# Allegro board MULTIFX.brd
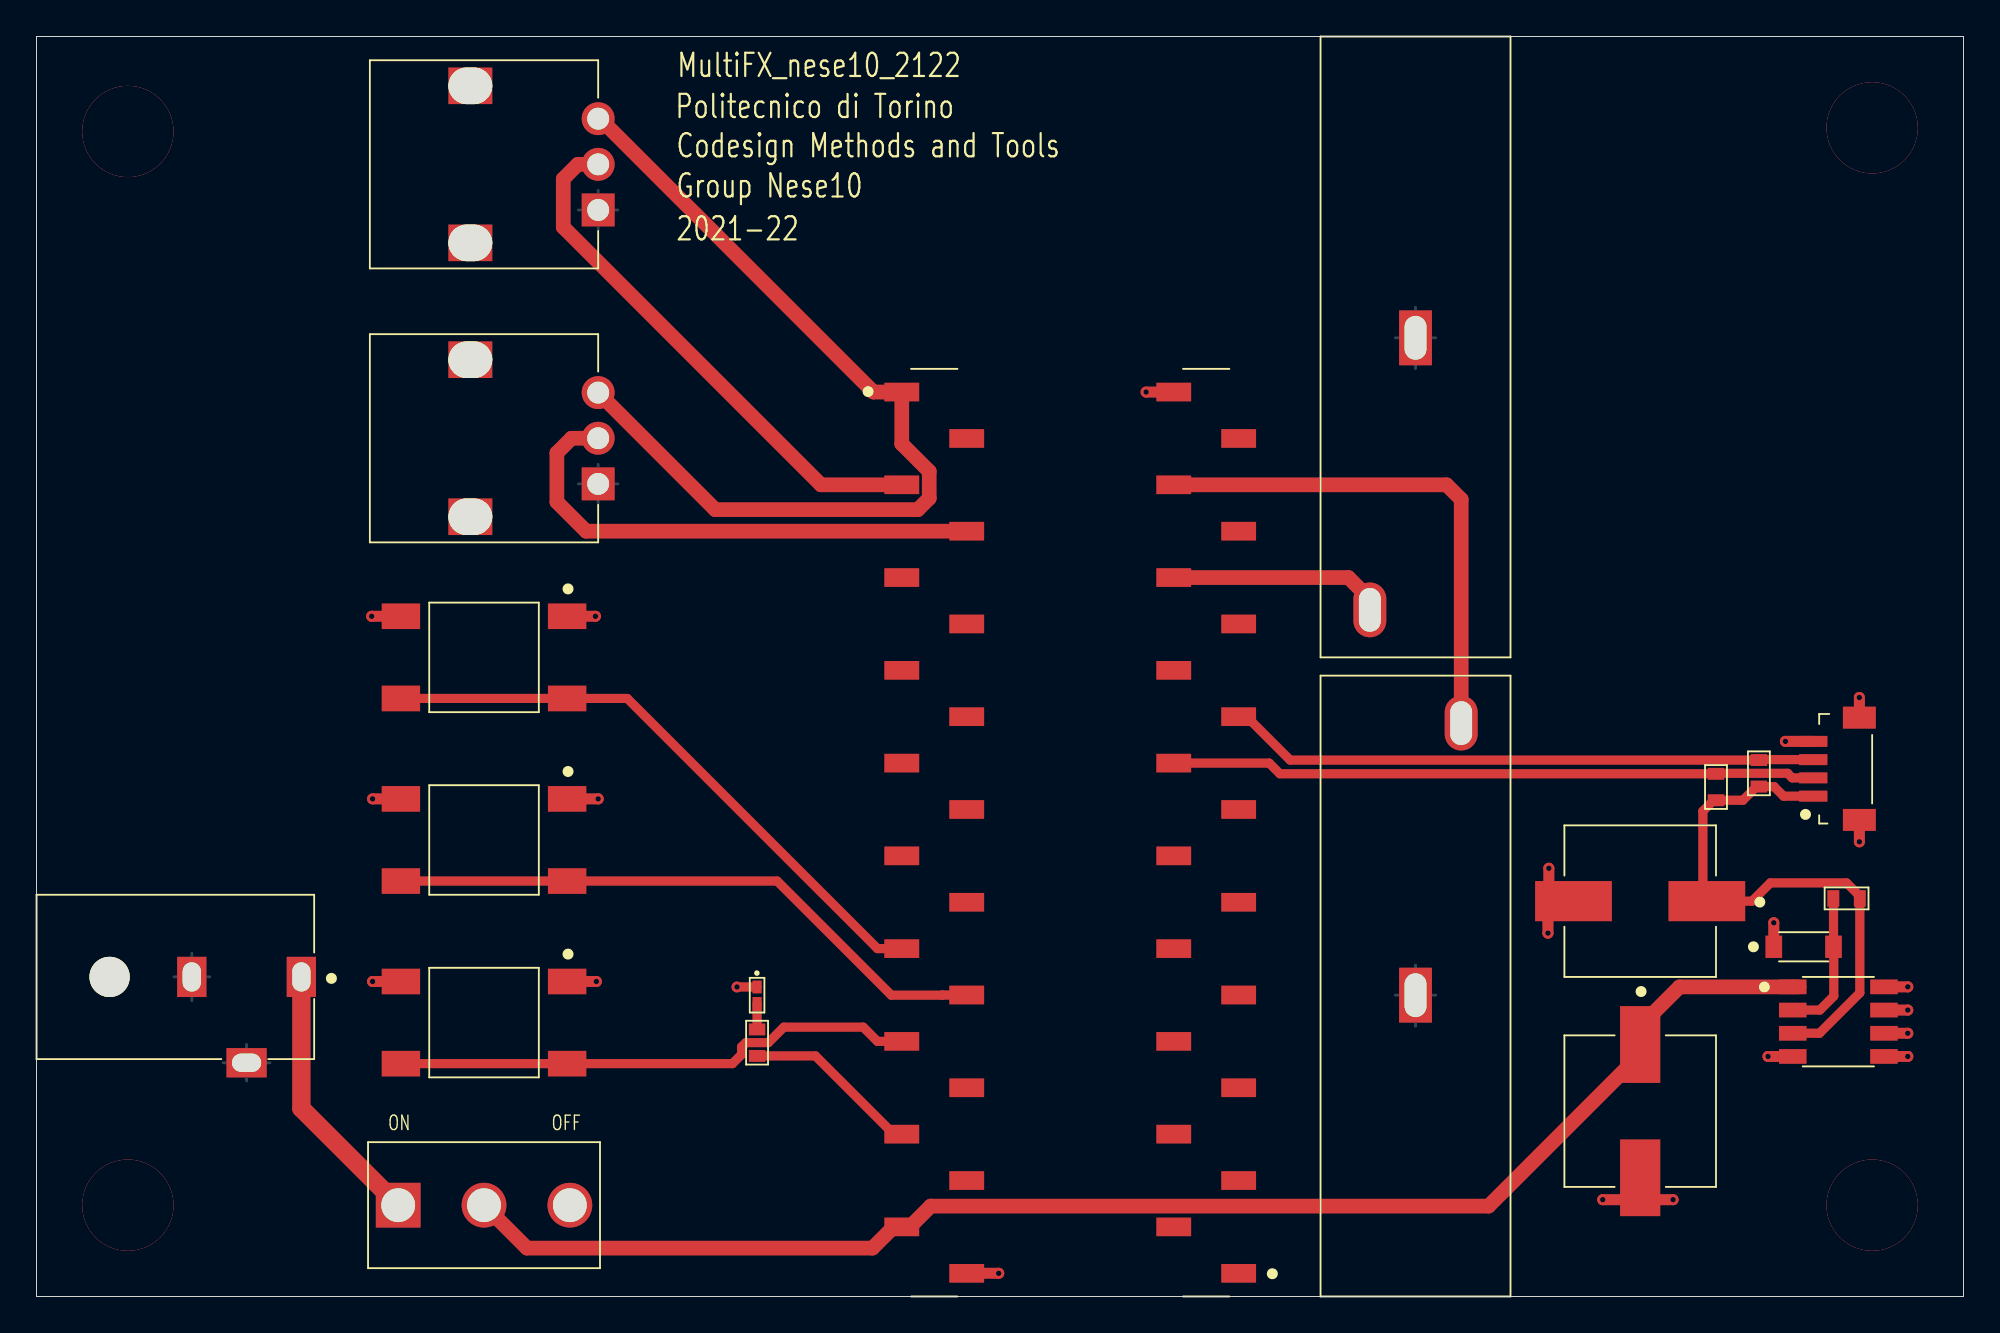
[diagram p0: board, top side]
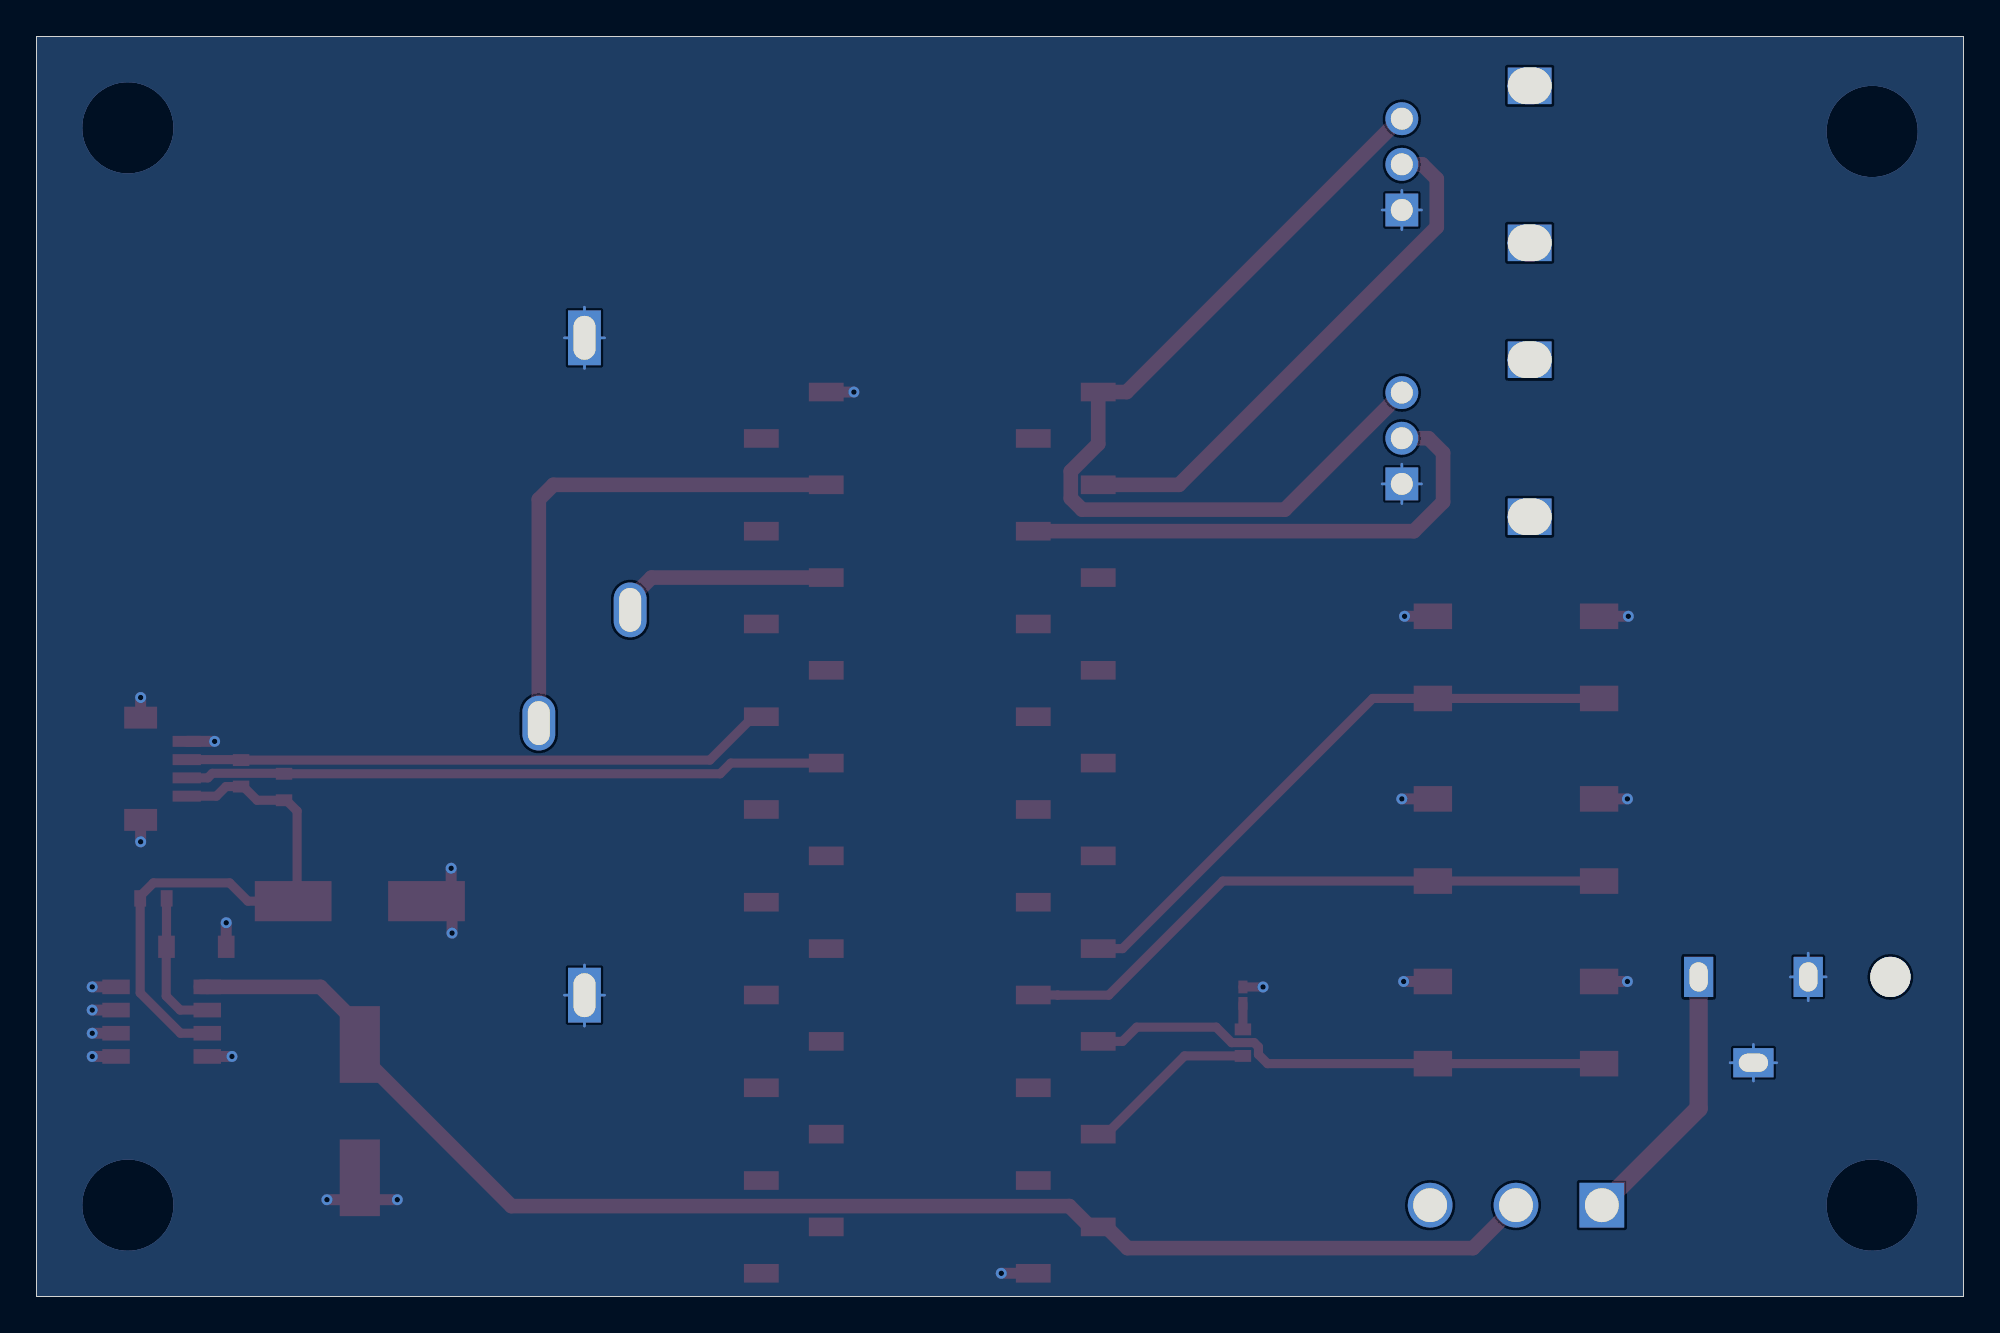
[diagram p1: board, bottom side, seen from below]

Outline 105.5 x 69 mm; copper layers: TOP, BOTTOM. Coordinates in mm from the lower left corner of the outline.
Outline path: 0,69 0,0 105.5,0 105.5,69 0,69

## Design rules (mm)
constraint set DEFAULT: min track width 0.127

## Placement (name value [footprint] x y rotation side)
C1  10uF  [SMD_A765KG106M1ELAE035]  87.8 10.15 270 top
C2  10uF  [SMD_A765KG106M1ELAE035]  87.8 21.65 180 top
CONN1  PJ059AH  [TH_PJ059AH]  7.6 17.5 270 top
CONN2  MJ-63022A  [SMD_MJ63022A]  75.5 52 270 top
CONN3  MJ-63022A  [SMD_MJ63022A]  75.5 17 90 top
CONN4  BM04BSRSSTB  [SMD_BM04BSRSSTB]  99.05 28.9 90 top
D1  MBR0580-TP  [SMD_MBR0580]  96.75 19.15 0 top
J1  SSM-120-L-SV  [SMD_SSM120LSV]  49.15 25.4 180 top
J2  SSM-120-L-SV  [SMD_SSM120LSV]  64.04 25.4 0 top
L1  47uH  [SMD_INDUCTOR0603]  99.1 21.8 0 top
LD1  APHHS1005LSECK/J3-PF  [SMD_APHHS1005LSECKJ3PF]  39.45 16.5 270 top
POT1  10k  [TH_POT3]  24.5 62 90 top
POT2  10k  [TH_POT3]  24.5 47 90 top
R1  750Ohm  [SMD_RESISTOR0603]  39.45 13.9 90 top
R2  2.2kOhm  [SMD_RESISTOR0603]  91.95 27.9 270 top
R3  2.2kOhm  [SMD_RESISTOR0603]  94.3 28.65 270 top
SW1  ANT11SF1CQE  [TH_ANT11SF1CQE]  24.5 5 270 top
SW2  TL3301DF260RG  [SMD_TL3301DF260RG]  24.5 35 180 top
SW3  TL3301DF260RG  [SMD_TL3301DF260RG]  24.5 25 180 top
SW4  TL3301DF260RG  [SMD_TL3301DF260RG]  24.5 15 180 top
U1  AP1509-33SG-13  [SMD_AP150933SG13]  98.65 15.05 0 top

## Library data of the parts
C1 C2 = cap_electrolytic
CONN1 = PJ059AH
CONN2 CONN3 = MJ-63022A
CONN4 = BM04B-SRSS-TB
D1 = Diode
J1 J2 = SSM120LSV
L1 = Inductor
LD1 = LED
POT1 POT2 = Potentiometer
R1-R3 = Resistor
SW1 = ANT11SF1CQE
SW2-SW4 = TL3301DF260RG
U1 = AP1509-33SG-13

## Footprints (pads in the part's own frame, mm; a bottom-side part is the same pattern mirrored in y, then rotated)
SMD_A765KG106M1ELAE035
  rect 4.2x2.2 smd: 1(-3.65,0) 2(3.65,0)
SMD_AP150933SG13
  rect 1.505x0.802 smd: 1(-2.498,1.905) 2(-2.498,0.635) 3(-2.498,-0.635) 4(-2.498,-1.905) 5(2.498,-1.905) 6(2.498,-0.635) 7(2.498,0.635) 8(2.498,1.905)
SMD_APHHS1005LSECKJ3PF
  rect 0.7x0.5 smd: 1(-0.45,0) 2(0.45,0)
SMD_BM04BSRSSTB
  rect 0.6x1.55 smd: 1(-1.5,1.775) 2(-0.5,1.775) 3(0.5,1.775) 4(1.5,1.775)
  rect 1.2x1.8 smd: 5(-2.8,-0.75) 6(2.8,-0.75)
SMD_INDUCTOR0603
  rect 0.65x0.9 smd: 1(-0.725,0) 2(0.725,0)
SMD_MBR0580
  rect 0.91x1.22 smd: 1(-1.635,0) 2(1.635,0)
SMD_MJ63022A
  rect 3x1.8 hole 2.4x1.2: 1(-0.5,0)
  oval 3x1.8 hole 2.4x1.2: 2(14.4,-2.5)
SMD_RESISTOR0603
  rect 0.65x0.9 smd: 1(-0.725,0) 2(0.725,0)
SMD_SSM120LSV
  rect 1.905x1.02 smd: 1(1.778,-24.13) 2(-1.778,-21.59) 3(1.778,-19.05) 4(-1.778,-16.51) 5(1.778,-13.97) 6(-1.778,-11.43) 7(1.778,-8.89) 8(-1.778,-6.35) 9(1.778,-3.81) 10(-1.778,-1.27) 11(1.778,1.27) 12(-1.778,3.81) 13(1.778,6.35) 14(-1.778,8.89) 15(1.778,11.43) 16(-1.778,13.97) 17(1.778,16.51) 18(-1.778,19.05) 19(1.778,21.59) 20(-1.778,24.13)
SMD_TL3301DF260RG
  rect 2.1x1.4 smd: 1(-4.55,-2.25) 2(4.55,-2.25) 3(-4.55,2.25) 4(4.55,2.25)
TH_ANT11SF1CQE
  rect 2.45x2.45 hole 1.85: 1(0,-4.7)
  round 2.45 hole 1.85: 2(0,0) 3(0,4.7)
TH_PJ059AH
  round 2.2 hole 2.2 unplated: (0,-3.6)
  rect 2.2x1.6 hole 1.6x1: 1(0,6.9) 2(0,0.9)
  rect 1.6x2.2 hole 1x1.6: 3(4.7,3.9)
TH_POT3
  rect 2x2.4 hole 2x2.4 unplated: (-4.3,0.75) (4.3,0.75)
  rect 1.8x1.8 hole 1.2: 1(-2.5,-6.25)
  round 1.8 hole 1.2: 2(0,-6.25) 3(2.5,-6.25)

## Nets
3V3_OLED: C2.1 CONN4.1 L1.2(P2) R2.2(P2) R3.2(P2) U1.3
3V3A: J1.1 POT1.3 POT2.3
GND: C1.2(P2) C2.2(P2) CONN1.2 CONN1.3 CONN2.1 CONN3.1 CONN4.4 CONN4.5 CONN4.6(P6) D1.1 J1.20 J2.20 LD1.1(C) POT1.1 POT2.1 SW2.1 SW2.2 SW3.1 SW3.2 SW4.1 SW4.2 U1.4 U1.5 U1.6 U1.7 U1.8
VIN: C1.1 J1.19 SW1.2 U1.1(VIN)
AUDIO_IN1: CONN2.2(P2) J2.16
AUDIO_OUT1: CONN3.2(P2) J2.18
BACK_FX: J1.13 SW2.3 SW2.4(P4)
DC_IN: CONN1.1 SW1.1
LED_BYPASS: J1.17 R1.1
NEXT_FX: J1.14 SW3.3 SW3.4(P4)
SCL: CONN4.2 J2.12 R2.1
SDA: CONN4.3 J2.13 R3.1
TOGGLE_BYPASS: J1.15 SW4.3 SW4.4(P4)
TUNE_FX: J1.4 POT2.2
VOL: J1.3 POT1.2
N05908: LD1.2 R1.2(P2)
N13864: D1.2(K) L1.1 U1.2

Pads without a net: J1 2 5 6 7 8 9 10 11 12 16 18; J2 1 2 3 4 5 6 7 8 9 10 11 14 15 17 19; SW1 3

## Via types
v1: diameter 0.6, hole 0.3, TOP to BOTTOM, 22 vias
v2: diameter 5, hole 5, TOP to BOTTOM, 4 vias

## Routing (per net, layer and track width the routed paths; a pad name or vN(x,y) marks a point on that pad's centre or on a via; arc(x,y) is an arc through that point)
3V3_OLED: length 30.8
  TOP w0.5: CONN4.1 95.65,27.4 95.13,27.93 R3.2 94.17,27.93 93.42,27.18 R2.2 91.83,27.18 91.23,26.58 91.23,21.87 C2.1 93.93,21.65 94.93,22.65 99.1,22.65 99.83,21.93 L1.2 99.83,16.62 97.61,14.41 U1.3
3V3A: length 50.8
  TOP w0.8: 47.81,49.53 J1.1 ; J1.1 47.37,46.69 48.88,45.19 48.88,43.71 48.26,43.09 37.16,43.09 POT2.3 ; J1.1 45.82,49.53 30.85,64.5 POT1.3 30.74,64.5
GND: length 64.3
  TOP w0.5: LD1.1 v1(38.35,16.95)
  TOP w0.6: U1.6 v1(102.45,14.41) ; U1.5 v1(102.45,13.15) ; U1.8 v1(102.45,16.96) ; SW3.1 v1(30.75,27.25) ; J1.20 v1(52.68,1.27) ; CONN4.5 v1(99.8,24.9) ; U1.7 v1(102.45,15.69) ; 83.4,21.65 C2.2 ; 83.4,21.65 82.75,21 v1(82.75,19.9) ; 83.4,21.65 82.8,22.25 v1(82.8,23.45) ; v1(89.6,5.3) 88.35,5.3 87.8,5.85 87.8,5.9 ; CONN4.4 v1(95.75,30.4) ; SW2.2 v1(18.35,37.25) ; C1.2 87.8,5.9 ; 87.8,5.9 87.2,5.3 v1(85.75,5.3) ; SW3.2 v1(18.4,27.25) ; v1(18.4,17.25) SW4.2 ; SW2.1 v1(30.6,37.25) ; D1.1 v1(95.11,20.47) ; J2.20 v1(60.75,49.53) ; SW4.1 v1(30.65,17.25) ; U1.4 v1(94.8,13.15) ; CONN4.6 v1(99.8,32.8)
  BOTTOM w0.15: CONN2.1 75.5,50.82 ; CONN2.1 74.4,52.5 ; CONN2.1 75.5,54.18 ; CONN2.1 76.6,52.5 ; POT2.1 30.75,43.42 ; POT2.1 29.67,44.5 ; POT2.1 31.83,44.5 ; POT2.1 30.75,45.58 ; CONN1.2 8.5,16.2 ; CONN1.2 8.5,18.8 ; CONN1.2 9.48,17.5 ; CONN1.2 7.52,17.5 ; CONN1.3 10.22,12.8 ; CONN1.3 11.5,13.8 ; CONN1.3 11.5,11.8 ; CONN1.3 12.78,12.8 ; POT1.1 29.67,59.5 ; POT1.1 30.75,60.58 ; POT1.1 31.83,59.5 ; POT1.1 30.75,58.42 ; CONN3.1 74.4,16.5 ; CONN3.1 76.6,16.5 ; CONN3.1 75.5,14.8 ; CONN3.1 75.5,18.15
  vias: v2(5,63.8) v2(5,5) v2(100.5,64) v2(100.5,5)
VIN: length 79.8
  TOP w0.8: 96.5,16.96 U1.1 89.95,16.96 87.8,14.8 C1.1 87.8,13.25 79.5,4.95 48.95,4.95 47.81,3.81 J1.19 46.93,3.81 45.77,2.65 26.85,2.65 SW1.2
AUDIO_IN1: length 11.8
  TOP w0.8: J2.16 71.83,39.37 73,38.2 CONN2.2
AUDIO_OUT1: length 28.3
  TOP w0.8: J2.18 77.2,44.45 78,43.65 CONN3.2
BACK_FX: length 33.1
  TOP w0.5: J1.13 46.04,19.05 32.34,32.75 SW2.3 SW2.4
DC_IN: length 14.7
  TOP w1: CONN1.1 14.5,10.3 SW1.1
LED_BYPASS: length 9.7
  TOP w0.5: J1.17 46.93,8.89 42.64,13.18 R1.1
NEXT_FX: length 33.6
  TOP w0.5: J1.14 49.6,16.51 49.59,16.5 46.8,16.5 40.55,22.75 SW3.3 SW3.4
SCL: length 35.4
  TOP w0.5: CONN4.2 96.12,28.4 95.87,28.65 91.97,28.65 R2.1 68.07,28.62 67.49,29.21 J2.12
SDA: length 32.5
  TOP w0.5: CONN4.3 94.33,29.4 R3.1 68.63,29.38 66.26,31.75 J2.13
TOGGLE_BYPASS: length 28.8
  TOP w0.5: J1.15 46.04,13.97 45.26,14.75 40.92,14.75 40.07,13.9 38.83,13.9 38.6,13.67 38.6,13.25 38.1,12.75 SW4.3 SW4.4
TUNE_FX: length 28.4
  TOP w0.8: POT2.2 29.29,47 28.49,46.2 28.49,43.51 30.09,41.91 J1.4
VOL: length 29.4
  TOP w0.8: 30.85,62 POT1.2 29.64,62 28.84,61.2 28.84,58.56 42.95,44.45 J1.3
N05908: length 1.4
  TOP w0.5: LD1.2 R1.2
N13864: length 7.9
  TOP w0.5: L1.1 98.37,21.61 98.39,21.6 D1.2 98.39,18.81 98.4,18.8 98.4,16.45 97.64,15.69 U1.2

## Copper pours and planes (outline as drawn; the poured copper is in the pictures)
GND on BOTTOM: 0,69 0,0 105.5,0 105.5,69

## Text on the board
Ref Des/Silkscreen Top: ON | OFF | Politecnico di Torino | Codesign Methods and Tools | Group Nese10 | 2021-22 | MultiFX_nese10_2122
